# Altium PCB dsPIC Click v1.3.PcbDoc
Units mil, origin at the board's own origin, x right, y up, seen from the top; angles counter-clockwise.
Board outline 1500 x 2500 mil, 2 copper layers (Top Layer, Bottom Layer); 74 components, 48 nets, 196 pads, 45 vias.
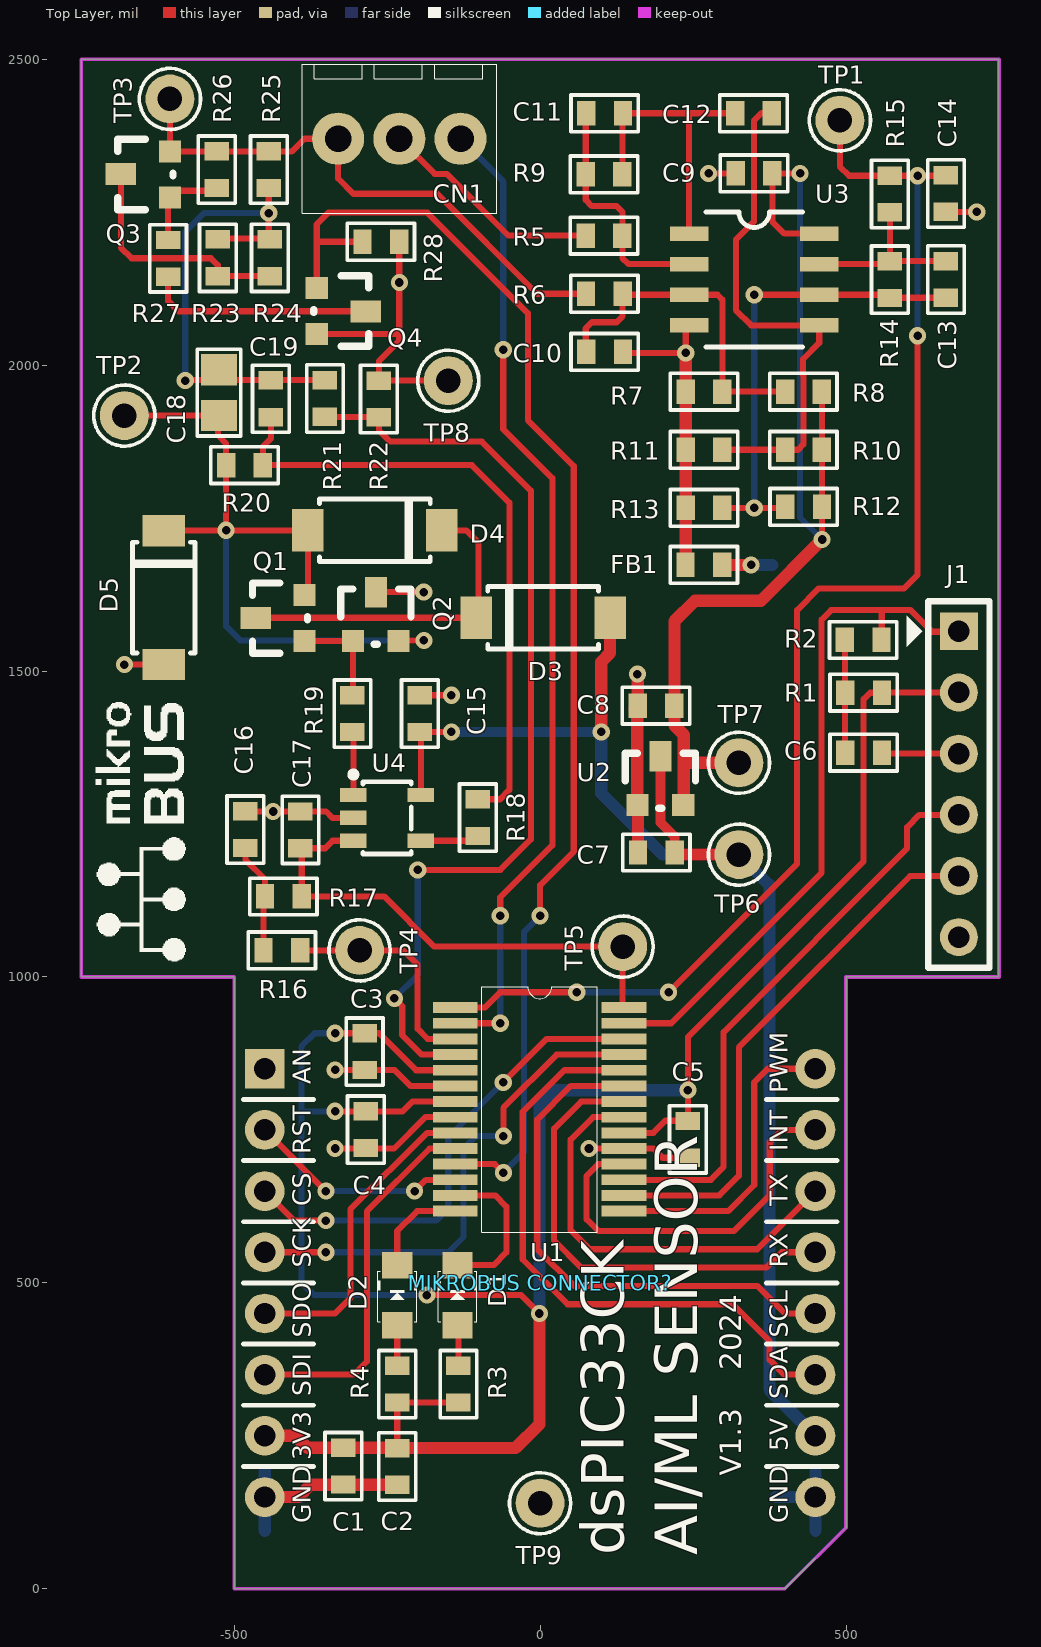
[diagram p0: Top Layer view]
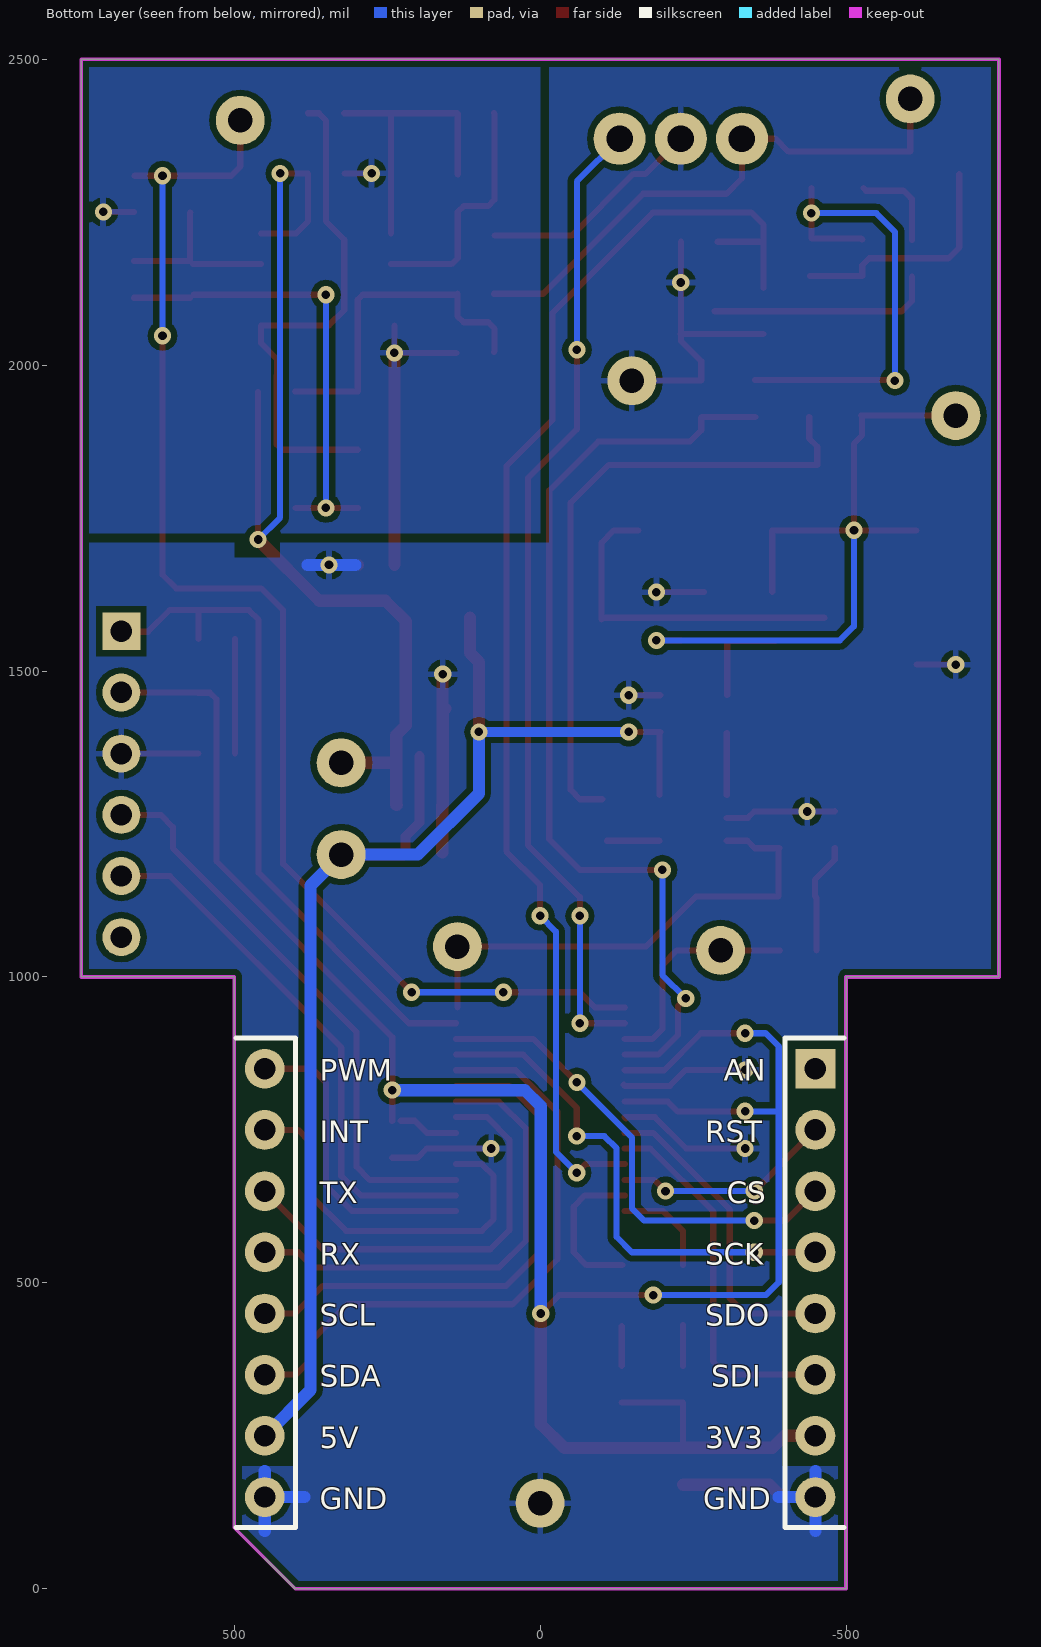
[diagram p1: Bottom Layer view, seen from below]

## Layer stack, top to bottom
Top Solder: solder mask 0.4, Solder Resist, Dk 3.5
Top Layer: signal copper 1.4
Dielectric 1: dielectric 12.6, FR-4, Dk 4.8
Bottom Layer: signal copper 1.4
Bottom Solder: solder mask 0.4, Solder Resist, Dk 3.5

## Board outline
-750,1000 -750,2500 750,2500 750,1000 500,1000 500,100 400,0 -500,0 -500,1000

## Design rules (kind name [scope] priority, off if disabled: settings)
Clearance [All] p1: gap=10
PolygonConnect [All] p1: connectstyle=Relief reliefconductorwidth=10 reliefentries=4 polygonreliefangle="90 Angle" airgapwidth=10
RoutingVias [All] p1: holewidth=28 width=50 viastyle="Through Hole" minholewidth=28 minwidth=50 maxholewidth=28 maxwidth=50
SolderMaskExpansion [All] p1: expansion=4
Width [All] p1: maxlimit=100 minlimit=8 preferedwidth=10 minimp=50.000000 maximp=50.000000 favimp=50.000000
30 further rules are at their usual default settings.

## Components (designator, comment, footprint, x,y, rotation, side; value= is the part's Value field where it differs from the comment)
C1 "1uF" 0603 -320,170 r90 top locked
C2 "0.1uF" 0603 -235,230.42 r270 top locked
C3 "0.1uF" 0603 -285,847.6 r90 top
C4 "0.1uF" 0603 -283.04,720 r90 top
C5 "0.1uF" 0603 240,765 r270 top
C6 "0.1uF" 0603 498.43,1365 r0 top locked
C7 "0.1uF" 0603 220.42,1205 r180 top
C8 "1uF" 0603 220,1445 r180 top
C9 "0.1uF" 0603 380,2315 r180 top
C10 "0.1uF" 0603 75,2020 r0 top
C11 "47pF" 0603 75,2410 r0 top
C12 "0.1uF" 0603 318.5,2410 r0 top
C13 "1000pF" 0603 665,2109.58 r90 top
C14 "680pF" 0603 665,2250 r90 top
C15 "1uF" 0603 -194.88,1400 r90 top
C16 "0.015uF" 0603 -480,1210.42 r90 top
C17 "1500pF" 0603 -390,1210 r90 top
C18 "22uF" 0805 -524.8,1955 r90 top
C19 "0.1uF" 0603 -441.6,1975.42 r270 top
CN1 "1725669" 1725669 -330,2370 r0 top locked
D1 "LED Red" LTST-C171 -135,480 r90 top
D2 "LED Green" LTST-C171 -233.4,480 r90 top
D3 "SS14" SMA-FL 5,1587 r180 top
D4 "SS14" SMA-FL -270,1730 r0 top
D5 "SS14" SMA-FL -615,1620 r90 top
FB1 "FB" 0603 298.02,1675 r180 top
J1 "ICSP" HDR1X6 684.41,1565 r270 top locked
"MIKROBUS CONNECTOR?" "MIKROBUS DEVICE CONN." MIKRO_BUS_DSPIC_T 0,0 r0 top locked
Q1 "MMBT3904" SOT-23 -385,1550 r90 top
Q2 "MMBT3906" SOT-23 -305,1549 r0 top
Q3 "PMV48XP" SOT-23 -605,2275 r90 top
Q4 "2N7002" SOT-23 -365,2125 r270 top
R1 "10k" 0603 498.43,1463 r0 top locked
R2 "470R" 0603 558.43,1552.4 r180 top locked
R3 "330R" 0603 -135,365 r270 top
R4 "330R" 0603 -235,365 r270 top
R5 "10K" 0603 74.15,2210 r0 top
R6 "10K" 0603 74.58,2115 r0 top
R7 "10K" 0603 237.6,1955 r0 top
R8 "200K" 0603 400,1955 r0 top
R9 "100K" 0603 135,2313.4 r180 top
R10 "100K" 0603 400,1860 r0 top
R11 "100K" 0603 237.6,1860 r0 top
R12 "1K" 0603 400.42,1766.6 r0 top
R13 "1K" 0603 237.6,1765 r0 top
R14 "4.99K" 0603 570,2170 r270 top
R15 "10K" 0603 570,2310 r270 top
R16 "1K" 0603 -391.6,1045 r180 top
R17 "10K" 0603 -450,1130 r0 top
R18 "10K" 0603 -100,1230 r90 top
R19 "0R" 0603 -305,1400 r90 top
R20 "100K" 0603 -513.46,1835 r0 top
R21 "100K" 0603 -350,1915 r90 top
R22 "10K" 0603 -265,1975 r270 top
R23 "20R" 0603 -525,2145 r90 top
R24 "20R" 0603 -440,2145 r90 top
R25 "1K" 0603 -445,2350 r270 top
R26 "100K" 0603 -530,2350 r270 top
R27 "100K" 0603 -609.57,2205 r270 top
R28 "10K" 0603 -290.63,2200 r0 top
TP1 "Test Point" TP_KEYSTONE_5003 490,2400 r90 top
TP2 "Test Point" TP_KEYSTONE_5003 -679.45,1917.6 r90 top
TP3 "Test Point" TP_KEYSTONE_5003 -605,2435 r90 top
TP4 "Test Point" TP_KEYSTONE_5003 -295,1043.4 r90 top
TP5 "Test Point" TP_KEYSTONE_5003 135,1049.64 r90 top
TP6 "Test Point Red" TP_KEYSTONE_5003 325,1200 r0 top
TP7 "Test Point" TP_KEYSTONE_5003 325,1350 r0 top
TP8 "Test Point" TP_KEYSTONE_5003 -150,1974.58 r90 top
TP9 "Test Point" TP_KEYSTONE_5003 0,140 r90 top
U1 "dsPIC33CK256MC502" SSOP-28 -0.68,783.62 r270 top locked
U2 "MCP1754ST-3.3v" SOT-23 160,1280.91 r0 top
U3 "MCP6002" SOIC-8 350,2140 r0 top
U4 "MCP6001" TSOP-5 -250,1260 r270 top
? "MikroBusLogo" MB_Large -650,1045 r90 top locked

## Footprints (in the part's own frame and the unit in brackets; to place one, negate y for a bottom-side part, rotate by r counter-clockwise, add the part's x,y. Pads: shape width x height; smd on the part's side, far side on the other; paste and mask are expansions set on the pad)
0603 [mil]
  rect 30x40 smd: 1(0.42,1.6) 2(60.42,1.6)
  silkscreen extent -25,-28 85,32
0805 [mm]
  rect 1.3x1.5 smd: 1(-0.95,0) 2(0.95,0)
  silkscreen extent -1.8,-0.9 1.8,0.9
1725669 [mil] "Connector; Terminal; 3 Position, 2.45mm"
  round 85 hole 43.31: 1(0,0) 2(100,0) 3(200,0)
  silkscreen extent -59,-122 259,122
HDR1X6 [mil]
  rect 62x62 hole 35: 1(0,0)
  round 62 hole 35: 2(100,0) 3(200,0) 4(300,0) 5(400,0) 6(500,0)
  silkscreen extent -49,-85 550,50
LTST-C171 [mm] "led, 0805"
  rect 1.1x1.25 smd: 1(-1.25,0) 2(1.25,0)
  silkscreen extent -1.1,-0.8 1,0.8
MB_Large [mil]
  silkscreen extent -20,-71 404,76
MIKRO_BUS_DSPIC_T [mil]
  rect 65x65 hole 35: 1(-450,850)
  round 65 hole 35: 2(-450,750) 3(-450,650) 4(-450,550) 5(-450,450) 6(-450,350) 7(-450,250) 8(-450,150) 9(450,150) 10(450,250) 11(450,350) 12(450,450) 13(450,550) 14(450,650) 15(450,750) 16(450,850)
  silkscreen extent -485,200 485,800, body extent -508,100 507,900, height 82
SMA-FL [mm]
  rect 1.3x1.76 smd: 1(-2.78,0) 2(2.78,0)
  silkscreen extent -2.3,-1.3 2.3,1.3
SOIC-8 [mm]
  rect 1.6x0.6 smd: 1(-2.7,1.905) 2(-2.7,0.635) 3(-2.7,-0.635) 4(-2.7,-1.905) 5(2.7,-1.905) 6(2.7,-0.635) 7(2.7,0.635) 8(2.7,1.905)
  silkscreen extent -2,-2.81 2,2.8
SOT-23 [mil]
  rect 36x36 smd: 1(-1,0) 2(74,0)
  rect 36x50 smd: 3(37,80)
  silkscreen extent -21,-5 94,85
SSOP-28 [mm]
  rect 0.45x1.85 smd mask+0.08: 1(-4.225,-3.5) 2(-3.575,-3.5) 3(-2.925,-3.5) 4(-2.275,-3.5) 5(-1.625,-3.5) 6(-0.975,-3.5) 7(-0.325,-3.5) 8(0.325,-3.5) 9(0.975,-3.5) 10(1.625,-3.5) 11(2.275,-3.5) 12(2.925,-3.5) 13(3.575,-3.5) 14(4.225,-3.5) 15(4.225,3.5) 16(3.575,3.5) 17(2.925,3.5) 18(2.275,3.5) 19(1.625,3.5) 20(0.975,3.5) 21(0.325,3.5) 22(-0.325,3.5) 23(-0.975,3.5) 24(-1.625,3.5) 25(-2.275,3.5) 26(-2.925,3.5) 27(-3.575,3.5) 28(-4.225,3.5)
  silkscreen extent -5.1,-2.4 5.1,2.4
TP_KEYSTONE_5003 [mil]
  round 80 hole 40: 1(0,0)
  silkscreen extent -50,-50 50,50
TSOP-5 [mm] "Small Outline; 6 Leads (1 Absent); Body Width 4.4 mm; Pitch 1.27 mm"
  rect 0.6x1.1 smd: 1(-0.95,-1.4) 2(0,-1.4) 3(0.95,-1.4) 4(0.95,1.4) 5(-0.95,1.4)
  silkscreen extent -1.92,-1.52 1.5,1

## Part data
C1 C2 C3 C4 C5 C6: "Capacitor"
C7 C8 C9 C10 C11 C12 C13 C14 C15 C16 C17 C18 C19: library part CAP, "Capacitor"
CN1: "Terminal Block, 3-Position"
D1: "Red LED"
D2: "Green LED"
D3 D4 D5: "Diode, Schottky"
FB1: "Ferrite Bead"
J1: library part "Header 6", "Header, 6-Pin"
"MIKROBUS CONNECTOR?": "mikroBUS Target Header"
Q1: "Transistor, NPN"
Q2: "Transistor, PNP"
Q3: "MOSFET, P-Channel"
Q4: "MOSFET"
R1 R2 R3 R4 R5 R6 R7 R8 R9 R10 R11 R12 R13 R14 R15 R16 R17 R18 R19 R20 R21 R22 R23 R24 R25 R26 R27 R28: library part Res1, "Resistor"
TP1 TP2 TP3 TP4 TP5 TP6 TP7 TP8 TP9: "Test Point, 5003"
U1: "16-bit MCU"
U2: "LDO"
U3: "OPAMP, Dual"
U4: "OPAMP, Single"
?: "Logo"

## Via types
v1: diameter 28, hole 14, Top Layer to Bottom Layer, 45 vias

## Nets (pads, with @x,y where several pads share a name; then routed paths per layer and width w, separated by ;. In a path a pad name is that pad's centre, name@x,y a point inside that pad or via, vN(x,y) a via of type N, cw(c..) or ccw(c..) an arc to the next point about the centre after c; other vN are vias at no path point)
+3.3: "MIKROBUS CONNECTOR?.7" C1.2 C2.1 C3.2 C4.2 C5.1 J1.2 R1.2 R3.2 R4.2 U1.5 U1.7 U1.20 | length 3832.2
  Top Layer w10: v1(-335,780.42) C4.2 -224.58,780.42 -208.58,796.42 U1.7 ; v1(-335,908.02) C3.2 -263.02,908.02 -202.6,847.6 U1.5 ; C1.2 C1.2@-318.23,233.8 ; C2.1 R4.2 R3.2 ; v1(-185,480) -31,480 v1(-1,450) ; U1.20 185.03,745.24 204.8,765 C5.1@227.72,765 ; C5.1 v1(241.6,815) 241.6,901.6 528.85,1188.85 528.85,1453.85 539.6,1464.6 R1.2 ; R1.2@559.25,1465 J1.2
  Top Layer w20: -450,250 -399.58,250 -380,230.42 C1.2 -233.83,230.42 C2.1 -40,230 -1,269 v1(-1,450)
  Bottom Layer w10: -390,780.42 v1(-335,780.42) ; v1(-335,908.02) -368.58,908.02 -390,886.6 -390,500.8 -369.2,480 v1(-185,480)
  Bottom Layer w20: v1(-1,450) -1,789 25,815 v1(241.6,815)
+3.3A: C8.1 C9.1 R8.2 R10.2 R12.2 TP7.1 U2.2 U3.8 | length 1758
  Top Layer w10: v1(425,2313.4) C9.1 379.58,2234.68 399.25,2215 U3.8 ; v1(460.85,1715) R12.2 R8.2@460.85,1956.17
  Top Layer w20: U2.2 235,1280.91 235,1350 ; TP7.1 235,1350 ; v1(460.85,1715) 360.85,1615 253.02,1615 219.58,1581.55 C8.1 219.58,1410.85 235,1395.42 235,1350
  Bottom Layer w10: v1(425,2313.4) 425,1750.85 v1(460.85,1715)
+5: "MIKROBUS CONNECTOR?.10" C7.1 C15.1 D3.1 TP6.1 U2.3 U4.5 | length 2230
  Top Layer w10: U4.5 -194.88,1398.83 C15.1 v1(-145,1400.42)
  Top Layer w16: U2.3 197,1252.58 220,1229.58 C7.1
  Top Layer w20: v1(100,1400.42) 100,1514.85 114.45,1529.3 D3.1 ; C7.1@223.4,1200 TP6.1
  Bottom Layer w16: v1(-145,1400.42) v1(100,1400.42)
  Bottom Layer w20: v1(100,1400.42) 100,1300 200,1200 TP6.1 374.47,1150.53 374.47,1150 375,1149.47 375,325 450,250
AGND: C9.2 C10.2 C14.1 FB1.2 R7.1 R11.1 R13.1 U3.4 | length 586.6
  Top Layer w10: C10.2@137.02,2020 v1(238.02,2020) U3.4@238.02,2065 ; v1(275.42,2313.4) C9.2 ; C14.1 v1(713.73,2250.42)
  Top Layer w20: FB1.2@238.02,1673.83 R13.1 R11.1 R7.1 v1(238.02,2020)
BAT_DETECT: R21.1 R22.2 U1.4 | length 1565.6
  Top Layer w10: R21.1 -264.25,1915.42 R22.2 -263.4,1893.4 -245,1875 -95,1875 -15,1795 -15,1225 -65,1175 v1(-200,1175) ; v1(-238.02,965) -225.2,952.18 -225.2,905 -193.39,873.19 U1.4
  Bottom Layer w10: v1(-238.02,965) -200,1003.02 v1(-200,1175)
BAT_SNS_ADC: C14.2 R15.1 TP1.1 U1.1 | length 2198
  Top Layer w10: U1.1 -90.24,949.96 -65.2,975 v1(60,975) ; v1(210,975) 420,1185 420,1599.58 455.42,1635 595,1635 617.08,1657.08 v1(617.08,2047.92) ; TP1.1 490,2324.58 505,2309.58 R15.1 v1(617.08,2309.58) C14.2@662.55,2309.58
  Bottom Layer w10: v1(60,975) v1(210,975) ; v1(617.08,2047.92) v1(617.08,2309.58)
BAT_TH: CN1.3 U1.2 | length 1616.4
  Top Layer w10: U1.2 v1(-65,924.37) ; v1(-65,1100) -65,1130.2 20,1215.2 20,1815 -60.2,1895.2 v1(-60.2,2025)
  Bottom Layer w10: CN1.3 -60.2,2300.2 v1(-60.2,2025) ; v1(-65,924.37) v1(-65,1100)
DAC_SINE: R16.1 TP4.1 U1.3 | length 375.1
  Top Layer w10: R16.1 -223.4,1043.4 -200.2,1020.2 -200.2,915 -183.98,898.78 U1.3
IRQ: "MIKROBUS CONNECTOR?.15" U1.18 | length 640.9
  Top Layer w10: U1.18 95.15,694.06 76.09,675 76.09,603.91 95,585 317.13,585 375.42,643.3 375.42,730 395.42,750 450,750
LED_GRN: D2.2 U1.14 | length 164.1
  Top Layer w10: D2.2 -233.4,585 -201.12,617.28 U1.14
LED_RED: D1.2 U1.13 | length 254.4
  Top Layer w10: U1.13 -73.08,642.87 -55,624.8 -55,550 -75.79,529.21 D1.2
MCLR: J1.1 R2.1 U1.27 | length 1131.7
  Top Layer w10: U1.27 214.37,924.37 460,1170 460,1583.9 475.75,1599.65 558.43,1599.65 ; R2.1@558.43,1552.4 558.43,1599.65 ; J1.1 683.62,1564.21 641.1,1564.21 605.67,1599.65 558.43,1599.65
NetC6_1: C6.1 R1.1 R2.2 | length 187.4
  Top Layer w10: C6.1@498.43,1365 498.43,1456.93 R2.2@498.43,1552.4
NetC10_1: C10.1 R6.2 R7.2 R8.1 U3.3 | length 561.6
  Top Layer w10: C10.1 74.58,2022.45 74.58,2060 84.58,2070 125,2070 135,2080 R6.2 ; R6.2@136.6,2115 U3.3 290,2115 298.02,2106.98 R7.2 R8.1
NetC11_1: C11.1 R5.2 R9.2 U3.2 | length 398.8
  Top Layer w10: C11.1 74.58,2410.75 R9.2 74.58,2270 84.58,2260 125,2260 134.58,2250.42 R5.2 134.58,2175 144.58,2165 U3.2
NetC11_2: C11.2 C12.1 R9.1 U3.1 | length 481.3
  Top Layer w10: R9.1 134.58,2410.75 C11.2 C12.1@320,2411.6 ; U3.1 243.7,2411.6
NetC12_2: C12.2 R10.1 R11.2 U3.5 | length 845
  Top Layer w10: R11.2 R10.1 421.6,1861.6 430.42,1870.42 430.42,1982.81 430,1983.24 430,2010 456.3,2036.3 U3.5 345,2065 320,2090 320,2205 349.58,2234.58 349.58,2399.58 361.6,2411.6 C12.2 C12.2@379.42,2411.6
NetC13_1: C13.1 R12.1 R13.2 R14.2 U3.6 | length 757.2
  Top Layer w10: R13.2 v1(350,1766.6) R12.1@399.25,1766.6 ; v1(350,2115) U3.6 R14.2@566.17,2115 ; R14.2@572.02,2110 C13.1
  Bottom Layer w10: v1(350,1766.6) v1(350,2115)
NetC13_2: C13.2 R14.1 R15.2 U3.7 | length 281.9
  Top Layer w10: U3.7 R14.1@567.02,2165 ; R15.2 572.02,2249.15 572.02,2170 C13.2
NetC16_1: C16.1 R16.2 R17.1 | length 181.7
  Top Layer w10: C16.1 -481.6,1191.6 -449.58,1159.58 R17.1 -452.02,1129.15 R16.2
NetC18_1: C18.1 D4.1 D5.2 Q1.2 Q2.2 R20.1 TP2.1 | length 1211.4
  Top Layer w10: TP2.1 C18.1 ; D5.2 -614.45,1730 v1(-513.04,1730) ; C18.1@-526.4,1915.42 -526.4,1885 -513.04,1871.64 R20.1 v1(-513.04,1730) ; Q1.2@-379.45,1629.55 D4.1 v1(-513.04,1730) ; Q2.2@-230,1550 v1(-190,1550)
  Bottom Layer w10: v1(-513.04,1730) -513.04,1573.04 -490,1550 v1(-190,1550)
NetC18_2: C18.2 C19.1 R21.2 R23.2 R24.2 R25.2 | length 787.2
  Top Layer w10: v1@-580,1975.42 -526.4,1975.42 R21.2 ; R23.2 -524.8,2207.23 -443.4,2207.23 v1(-443.4,2248.4) R25.2
  Bottom Layer w10: v1(-580,1974.58) -580,2217.83 -549.43,2248.4 v1(-443.4,2248.4)
NetC19_2: C19.2 R18.2 R20.2 | length 1039.6
  Top Layer w10: C19.2 -440,1880 -453.04,1866.96 R20.2 -111.6,1836.6 -50,1775 -50,1305.63 -65.2,1290.42 R18.2
NetD1_1: D1.1 R3.1 | length 64.6
  Top Layer w10: R3.1 D1.1@-133.4,429.19
NetD2_1: D2.1 R4.1 | length 66.2
  Top Layer w10: R4.1 D2.1
NetD3_2: D3.2 D4.2 Q1.3 | length 558.2
  Top Layer w10: Q1.3 D3.2@-100.6,1587 ; D4.2 -120.55,1730 -100.6,1710.05 D3.2@-100.6,1587 ; D3.2@-100.6,1584.45 D3.2@-100.6,1587
NetQ1_1: Q1.1 Q2.1 R19.2 | length 167
  Top Layer w10: Q1.1 Q2.1 R19.2@-306,1461.02
NetQ2_1: Q3.1 R26.2 R27.1 | length 153.7
  Top Layer w10: R27.1 -607.97,2271.03 Q3.1 -594,2285 -532.98,2285 R26.2
NetQ2_3: Q3.3 R23.1 R24.1 | length 393.1
  Top Layer w10: Q3.3 -685,2191.93 -667.65,2174.58 -537.98,2174.58 -526.6,2163.2 R23.1 R24.1
NetQ4_3: Q4.3 R27.2 | length 369.6
  Top Layer w10: R27.2 -607.97,2105 -590.97,2088 Q4.3
NetR18_1: R18.1 U4.4 | length 85.5
  Top Layer w10: U4.4 R18.1@-109.43,1222.6
NetR19_1: R19.1 U4.1 | length 101.5
  Top Layer w10: U4.1 R19.1@-305.12,1398.94
PGC: J1.5 U1.16 | length 886.6
  Top Layer w10: U1.16 292.87,642.87 325,675 325,885 605,1165 J1.5
PGD: J1.4 U1.17 | length 944
  Top Layer w10: U1.17 278.89,668.46 300,689.58 300,910 600,1210 600,1245 620,1265 J1.4
PWM: "MIKROBUS CONNECTOR?.16" U1.15 | length 507.5
  Top Layer w10: U1.15 307.28,617.28 350,660 350,827.6 372.4,850 450,850
RST: "MIKROBUS CONNECTOR?.2" U1.12 | length 360.6
  Top Layer w10: -450,750 v1(-350,650) ; v1(-205,650) -186.54,668.46 U1.12
  Bottom Layer w10: v1(-350,650) v1(-205,650)
RXD: "MIKROBUS CONNECTOR?.13" U1.22 | length 771.1
  Top Layer w10: U1.22 67.24,796.42 22.94,752.13 22.94,569.29 67.24,525 370,525 395,550 450,550
SCL: "MIKROBUS CONNECTOR?.12" U1.23 | length 874.5
  Top Layer w10: U1.23 50.5,822.01 -4.61,766.89 -4.61,555.12 55.5,495 355,495 400,450 450,450
SDA: "MIKROBUS CONNECTOR?.11" U1.24 | length 1009.3
  Top Layer w10: U1.24 39.68,847.6 -28.24,779.69 -28.24,538.24 45,465 315,465 375,405 375,374 399,350 450,350
SINE_ADC: C17.1 R17.2 TP5.1 U1.28 U4.3 | length 829.4
  Top Layer w10: U4.3 -339,1222.6 -351.17,1210.42 C17.1 -389.58,1208.4 R17.2 -254.99,1131.6 -173.03,1049.64 TP5.1 U1.28@135,949.96
SNS+: CN1.1 Q3.2 R6.1 R25.1 R26.1 TP3.1 | length 917.7
  Top Layer w10: TP3.1 Q3.2 -406,2349 -385,2370 CN1.1 -330,2305 -305,2280 -168.4,2280 -5,2116.6 R6.1
SNS-: "MIKROBUS CONNECTOR?.8" "MIKROBUS CONNECTOR?.9" C1.1 C2.2 C3.1 C4.1 C5.2 C6.2 C7.2 C8.2 C15.2 C16.2 C17.2 CN1.2 D5.1 FB1.1 J1.3 Q2.3 Q4.2 R5.1 R22.1 R28.2 TP8.1 TP9.1 U1.6 U1.8 U1.19 U2.1 U4.2 | length 2926.1
  Top Layer w10: v1(-679.45,1510.55) D5.1 ; C16.2 -481.17,1270.42 C17.2 -349.78,1270.42 -339.36,1260 U4.2 ; Q4.2 -230,2051 ; v1(-335,719.65) -238.64,719.65 -187.46,770.83 U1.8 U1.8@-140.2,769.09 ; v1(-335,848.02) -238.02,848.02 -212.01,822.01 U1.6 U1.6@-136.74,823.74 ; Q2.3 v1(-190.2,1629) ; R28.2 -230.2,2039.8 -263.4,2006.6 R22.1 TP8.1 ; CN1.2 -172.5,2312.5 -152.5,2312.5 -51.6,2211.6 R5.1 ; C15.2 v1(-145,1460.42) ; v1(80,719.65) U1.19 185.15,719.65 200.22,704.58 C5.2 ; C6.2@558.43,1365 J1.3
  Top Layer w20: -450,150 -395,150 -375,170 C2.2 ; C8.2@154.48,1438.31 C8.2@159,1442.83 ; v1@159.58,1494.42 C8.2 C8.2@159,1442.83 ; C7.2 160,1279.91 U2.1 C8.2@159,1442.83 ; FB1.1 v1(345,1673.4)
  Bottom Layer w20: -450,95 -450,150 ; -450,192.21 -450,150 ; -390,150 -450,150 ; 301.45,1673.4 v1(345,1673.4) 380,1673.4 ; 385,150 450,150 ; 450,95 450,150 ; 450,192.21 450,150
  other v1: -436.39,1270.42 159,1495 -230,2135
SPI_CS: "MIKROBUS CONNECTOR?.3" U1.26 | length 798.1
  Top Layer w10: -450,650 -401.73,601.73 v1(-350,601.73) ; v1(-60.2,827.6) 10.98,898.78 U1.26
  Bottom Layer w10: v1(-350,601.73) -170,601.73 -150,621.73 -150,737.8 v1(-60.2,827.6)
SPI_SCK: "MIKROBUS CONNECTOR?.4" U1.25 | length 832.9
  Top Layer w10: -450,550 v1(-350,550) ; v1(-60,740) -60,786 27.19,873.19 U1.25
  Bottom Layer w10: v1(-350,550) -150,550 -125,575 -125,720 -105,740 v1(-60,740)
SPI_SDI: "MIKROBUS CONNECTOR?.6" U1.10 | length 608.4
  Top Layer w10: -450,350 -304.58,350 -283.04,371.54 -283.04,616.96 -180.35,719.65 U1.10
SPI_SDO: "MIKROBUS CONNECTOR?.5" U1.9 | length 518.8
  Top Layer w10: -450,450 -335,450 -310,475 -310,620 -184.76,745.24 U1.9
TEST_EN: Q4.1 R28.1 U1.11 | length 2167.7
  Top Layer w10: Q4.1 -365,2230 -345.85,2249.15 -184.15,2249.15 -20,2085 -20,1910 55,1835 55,1205 0,1150 v1(0,1100) ; -365,2201.6 R28.1 ; U1.11 -74.06,694.06 v1(-60,680)
  Bottom Layer w10: v1(-60,680) -26,714 -26,1074 v1(0,1100)
TXD: "MIKROBUS CONNECTOR?.14" U1.21 | length 702.7
  Top Layer w10: U1.21 86.57,770.83 50,734.25 50,586.09 81.09,555 355,555 450,650
pads on no net: "MIKROBUS CONNECTOR?.1" J1.6

## Polygon pours and split planes (outlines as drawn)
AGND on Bottom Layer "TopLayer-No Net" (solid, pour order 2): 0,1725 750,1725 750,2500 0,2500
SNS- on Bottom Layer "SNS-_L02_P000" (solid, remove dead copper, pour order 0): -750,2500 -15,2500 -15,1710 424.6,1710 424.6,1685 500,1685 500,1710 750,1710 750,1000 500,1000 500,900 400,900 400,200 490,200 490,105 395,10 375,10 -490,10 -490,200 -395,200 -395,900 -500,900 -500,1000 -750,1000

## Keep-outs
Keep-Out Layer:
  the board outline again, w6

## Silkscreen, mask and mechanical layers (free items; w line width, h text height)
Top Overlay:
  text "V1.3    2024" at 340,185 h60 r90

## Text inside footprints (layer, text, board x,y; h text height)
"MIKROBUS CONNECTOR?": Top Overlay "dsPIC33CK / AI/ML SENSOR" at 280,55 h120 r90; Top Overlay "GND" at -375,107 h30 r90; Top Overlay "3V3" at -375,210 h30 r90; Top Overlay "5V" at 405,225 h30 r90; Top Overlay "SDI" at -375,315 h30 r90; Top Overlay "AN" at -375,825 h30 r90; Top Overlay "SCK" at -375,525 h30 r90; Top Overlay "INT" at 405,715 h30 r90; Top Overlay "RST" at -375,710 h30 r90; Top Overlay "SDO" at -375,410 h30 r90; Top Overlay "GND" at 405,107 h30 r90; Top Overlay "SDA" at 405,310 h30 r90; Top Overlay "SCL" at 405,410 h30 r90; Top Overlay "RX" at 405,525 h30 r90; Top Overlay "TX" at 405,625 h30 r90; Top Overlay "CS" at -375,625 h30 r90; Top Overlay "PWM" at 405,810 h30 r90; Bottom Overlay "SCL" at 360,430 h35; Bottom Overlay "INT" at 360,730 h35; Bottom Overlay "SDI" at -280,330 h35; Bottom Overlay "CS" at -305,630 h35; Bottom Overlay "GND" at -267,130 h35; Bottom Overlay "3V3" at -270,230 h35; Bottom Overlay "SDO" at -270,430 h35; Bottom Overlay "SDA" at 360,330 h35; Bottom Overlay "RST" at -270,730 h35; Bottom Overlay "PWM" at 360,830 h35; Bottom Overlay "GND" at 360,130 h35; Bottom Overlay "5V" at 360,230 h35; Bottom Overlay "RX" at 360,530 h35; Bottom Overlay "TX" at 360,630 h35; Bottom Overlay "AN" at -300,830 h35; Bottom Overlay "SCK" at -270,530 h35